# EAGLE board pianotiles (EAGLE 7.6.0)
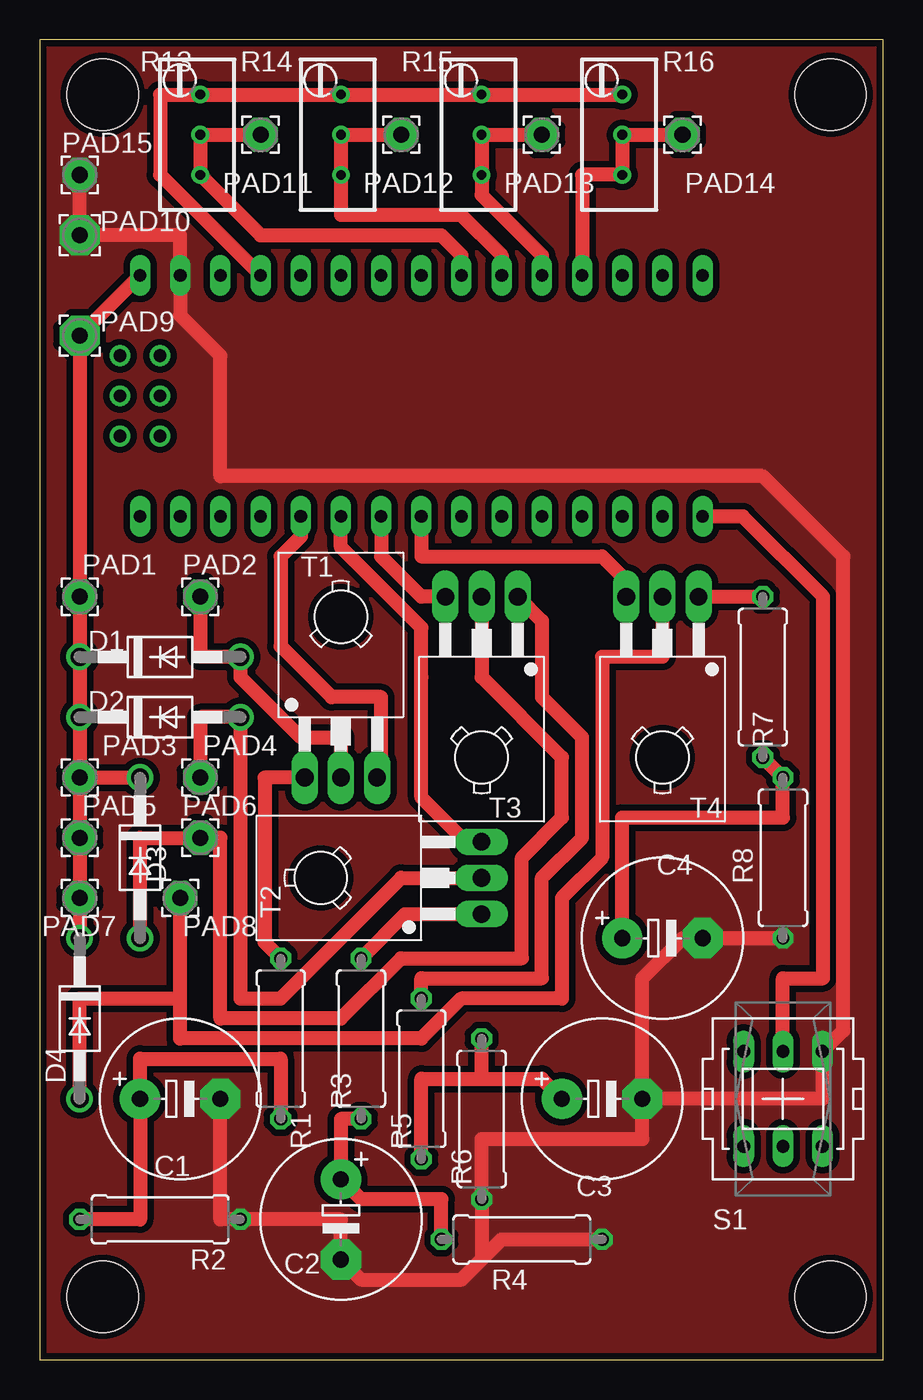
[diagram p0: board, top side]

Size 53.32 x 83.49 mm. Coordinates in mm from the lower left corner, seen from the top.
Outline: 0,0 53.32,0 53.32,83.49 0,83.49 0,0
Copper layers (1*16): Top 0.035mm / dielectric 1.5mm / Bottom 0.035mm
Design rules "default *": minimum track width 8mil, minimum drill 0.35mm, track to track 8mil, track to pad 8mil, pad to pad 8mil, via to via 8mil, smd to smd 0mil, copper to edge 0.002540625mm, drill to drill 6mil, minimum pad ring 10mil, minimum via ring 8mil, stop-mask expansion 4mil, vias tented up to drill 0mil, thermal gap 10mil
Net classes: 0 default: width 0.889 mm
Holes 4.5 mm at 4,4 50,4 4,80 50,80

## Footprints (pad centres in the part's own frame; a part is rotated, then mirrored left to right if it is on the bottom)
E5-10,5 = drill 1.016 pad 2.54: + -2.54,0 | drill 1.016 pad 2.54 octagon: - 2.54,0
DO41-10 = drill 1.118: A 5.08,0; C -5.08,0
2,15/1,0 = drill 1.016 pad 2.159 octagon: 1 0,0
2,54/1,0 = drill 1.016 pad 2.54 octagon: 1 0,0
0309/10 = drill 0.813 octagon: 1 -5.08,0; 2 5.08,0
RTRIMT93YA = drill 0.61: 1 0,-2.54; 2 0,0; 3 0,2.54
PVA2F = drill 0.813 long: 1 -2.997,2.489; 2 -2.997,0; 3 -2.997,-2.489; 4 2.997,2.489; 5 2.997,0; 6 2.997,-2.489
TO126 = drill 1.118 long: 1 -2.286,-5.08; 2 0,-5.08; 3 2.286,-5.08 | hole 3.302: 0,5.08
NANO = drill 0.8 long: 3.3V -10.16,24.13; 5V -10.16,-1.27; A0 -10.16,19.05; A1 -10.16,16.51; A2 -10.16,13.97; A3 -10.16,11.43; A4 -10.16,8.89; A5 -10.16,6.35; A6 -10.16,3.81; A7 -10.16,1.27; AREF -10.16,21.59; D2 5.08,1.27; D3 5.08,3.81; D4 5.08,6.35; D5 5.08,8.89; D6 5.08,11.43; D7 5.08,13.97; D8 5.08,16.51; D9 5.08,19.05; D10 5.08,21.59; D11 5.08,24.13; D12 5.08,26.67; D13 -10.16,26.67; GND -10.16,-6.35; GND1 5.08,-1.27; RAW -10.16,-8.89; RST -10.16,-3.81; RST1 5.08,-3.81; RX1 5.08,-6.35; TX0 5.08,-8.89 | drill 0.8: ICSP1 -5.08,-10.16; ICSP2 -5.08,-7.62; ICSP3 -2.54,-10.16; ICSP4 -2.54,-7.62; ICSP5 0,-10.16; ICSP6 0,-7.62

## Placement (x,y rotation side)
C1  3.3mF  [E5-10,5]  8.89,16.51 0 top
C2  3.3mF  [E5-10,5]  19.05,8.89 270 top
C3  3.3mF  [E5-10,5]  35.56,16.51 0 top
C4  3.3mF  [E5-10,5]  39.37,26.67 0 top
D1  1N4004  [DO41-10]  7.62,44.45 0 top
D2  1N4004  [DO41-10]  7.62,40.64 0 top
D3  1N4004  [DO41-10]  6.35,31.75 270 top
D4  1N4004  [DO41-10]  2.54,21.59 270 top
PAD1  S1+  [2,15/1,0]  2.54,48.26 0 top
PAD2  S1-  [2,15/1,0]  10.16,48.26 0 top
PAD3  S2+  [2,15/1,0]  2.54,36.83 0 top
PAD4  S2-  [2,15/1,0]  10.16,36.83 0 top
PAD5  S3+  [2,15/1,0]  2.54,33.02 0 top
PAD6  S3-  [2,15/1,0]  10.16,33.02 0 top
PAD7  S4+  [2,15/1,0]  2.54,29.21 0 top
PAD8  S4-  [2,15/1,0]  8.89,29.21 0 top
PAD9  Ucc  [2,54/1,0]  2.54,64.77 0 top
PAD10  GND  [2,54/1,0]  2.54,71.12 0 top
PAD11  Rf1  [2,15/1,0]  13.97,77.47 0 top
PAD12  Rf2  [2,15/1,0]  22.86,77.47 0 top
PAD13  Rf3  [2,15/1,0]  31.75,77.47 0 top
PAD14  Rf4  [2,15/1,0]  40.64,77.47 0 top
PAD15  GND  [2,15/1,0]  2.54,74.93 0 top
R1  3R3  [0309/10]  15.24,20.32 270 top
R2  24R  [0309/10]  7.62,8.89 180 top
R3  3R3  [0309/10]  20.32,20.32 270 top
R4  24R  [0309/10]  30.48,7.62 180 top
R5  3R3  [0309/10]  24.13,17.78 270 top
R6  24R  [0309/10]  27.94,15.24 90 top
R7  3R3  [0309/10]  45.72,43.18 270 top
R8  24R  [0309/10]  46.99,31.75 90 top
R13  2k  [RTRIMT93YA]  10.16,77.47 0 top
R14  2k  [RTRIMT93YA]  19.05,77.47 0 top
R15  2k  [RTRIMT93YA]  27.94,77.47 0 top
R16  2k  [RTRIMT93YA]  36.83,77.47 0 top
S1  PVA2  [PVA2F]  46.99,16.51 270 top
T1  BD139  [TO126]  19.05,41.91 0 top
T2  BD139  [TO126]  22.86,30.48 90 top
T3  BD139  [TO126]  27.94,43.18 180 top
T4  BD139  [TO126]  39.37,43.18 180 top
U$1  NANO  [NANO]  15.24,58.42 270 top

## Library data of the parts
C1-C4 = rcl; SPICEPREFIX: C
D1-D4 = diode
PAD1-PAD15 = wirepad
R1-R8 = rcl; SPICEPREFIX: R
R13-R16 = rcl; SPICEMODEL: X; SPICEPREFIXL: POT
S1 = switch-misc
T1-T4 = transistor
U$1 = Arduino-clone

## Nets
GND: C1.- C2.- C3.- C4.- PAD10.1 PAD15.1 R2.1 R4.1 R6.1 R8.1 S1.1 U$1.GND
N$1: C2.+ R3.2 R4.2
N$2: C1.+ R1.2 R2.2
N$3: R1.1 T1.1
N$4: R3.1 T2.1
N$5: T4.3 U$1.D5
N$6: D2.A PAD4.1 T2.2
N$7: T3.3 U$1.D4
N$8: C3.+ R5.2 R6.2
N$9: R5.1 T3.1
N$10: T2.3 U$1.D3
N$11: D3.A PAD6.1 T3.2
N$12: PAD11.1 R13.1 R13.2 U$1.A3
N$13: D1.C D2.C D3.C D4.C PAD1.1 PAD3.1 PAD5.1 PAD7.1 PAD9.1 U$1.RAW
N$14: D1.A PAD2.1 T1.2
N$15: S1.2 U$1.D12
N$16: C4.+ R7.2 R8.2
N$17: R7.1 T4.1
N$18: T1.3 U$1.D2
N$19: D4.A PAD8.1 T4.2
N$20: PAD12.1 R14.1 R14.2 U$1.A2
N$21: PAD13.1 R15.1 R15.2 U$1.A1
N$22: PAD14.1 R16.1 R16.2 U$1.A0
N$23: R13.3 R14.3 R15.3 R16.3 U$1.5V

## Tracks (layer width: path | path; a pad name or v marks a point on that pad's centre or on a via)
GND
  Top 0.889: C1.- 11.43,8.89 R2.1 19.05,8.89 C2.- 20.32,5.08 26.67,5.08 27.94,6.35 | C3.- 38.1,13.97 27.94,13.97 R6.1 27.94,6.35 | 27.94,6.35 29.21,7.62 R4.1 | R8.1 C4.- 40.64,26.67 38.1,24.13 C3.- | C3.- 49.53,16.51 49.48,16.56 S1.1 50.8,20.83 50.8,50.8 45.72,55.88 11.43,55.88 11.43,63.5 8.89,66.04 U$1.GND 8.89,71.12 PAD10.1 PAD15.1
  pour Top (isolate 0.406, no thermals): 0,83.82 0,0 53.34,0 53.34,83.82
N$1
  Top 0.889: R3.2 19.05,15.24 C2.+ 20.32,10.16 25.4,10.16 R4.2
N$2
  Top 0.889: R1.2 15.24,19.05 6.35,19.05 C1.+ 6.35,8.89 R2.2
N$3
  Top 0.889: T1.1 14.22,36.83 14.22,26.42 R1.1
N$4
  Top 0.889: T2.1 23.11,28.19 R3.1 | T2.1
N$5
  Top 0.889: U$1.D5 24.13,50.8 35.56,50.8 37.08,49.28 T4.3
N$6
  Top 0.889: PAD4.1 10.16,40.64 D2.A 12.7,22.86 15.24,22.86 22.86,30.48 T2.2
N$7
  Top 0.889: U$1.D4 21.59,50.8 24.13,48.26 T3.3
N$8
  Top 0.889: R5.2 24.13,17.78 27.94,17.78 | 27.94,17.78 31.75,17.78 C3.+ | 27.94,17.78 R6.2
N$9
  Top 0.889: T3.1 31.75,46.74 31.75,41.91 34.29,39.37 34.29,33.02 31.75,30.48 31.75,24.13 24.13,24.13 R5.1
N$10
  Top 0.889: T2.3 26.92,32.77 24.13,35.56 24.13,43.18 | 24.13,43.18 | 24.13,43.18 24.13,46.31 19.05,51.39 U$1.D3
N$11
  Top 0.889: T3.2 27.94,43.18 33.02,38.1 33.02,34.29 30.48,31.75 30.48,25.4 22.86,25.4 19.05,21.59 11.43,21.59 11.43,33.02 PAD6.1 6.35,33.02 D3.A
N$12
  Top 0.889: U$1.A3 26.67,69.85 25.4,71.12 13.97,71.12 R13.1 R13.2 PAD11.1
N$13
  Top 0.889: PAD3.1 D3.C | D4.C PAD7.1 PAD5.1 PAD3.1 | U$1.RAW PAD9.1 PAD1.1 D1.C D2.C PAD3.1
N$14
  Top 0.889: PAD2.1 10.16,44.45 D1.A 12.7,43.18 16.51,39.37 19.05,39.37 T1.2
N$15
  Top 0.889: S1.2 46.99,24.13 49.53,24.13 49.53,48.26 44.45,53.34 U$1.D12
N$16
  Top 0.889: R7.2 R8.2 46.99,34.29 36.83,34.29 C4.+
N$17
  Top 0.889: T4.1 R7.1
N$18
  Top 0.889: U$1.D2 16.51,52.07 15.24,50.8 15.24,45.13 18.46,41.91 21.59,41.91 21.59,37.08 T1.3
N$19
  Top 0.889: D4.A 2.54,22.86 8.89,22.86 | 8.89,22.86 PAD8.1 | 8.89,22.86 8.89,20.32 24.13,20.32 26.67,22.86 33.02,22.86 33.02,29.21 35.56,31.75 35.56,44.45 39.37,44.45 T4.2
N$20
  Top 0.889: U$1.A2 29.21,69.85 26.67,72.39 19.05,72.39 R14.1 R14.2 PAD12.1
N$21
  Top 0.889: U$1.A1 31.75,69.85 27.94,73.66 R15.1 R15.2 PAD13.1
N$22
  Top 0.889: U$1.A0 34.29,74.93 R16.1 R16.2 PAD14.1
N$23
  Top 0.889: U$1.5V 7.62,74.93 7.62,80.01 R13.3 R14.3 R15.3 R16.3